# Altium PCB POT 10x8.PcbDoc (part 3 of 4)
Units mm, origin at the board's own origin, x right, y up, seen from the top; angles counter-clockwise.
Board outline 152.4 x 101.6 mm, 4 copper layers (Top Layer, Mid Layer 1, Mid Layer 2, Bottom Layer), stack 0.97 mm thick; 324 components, 355 nets, 1533 pads, 300 vias.
Unrouted connection lines stored in the file: 224.
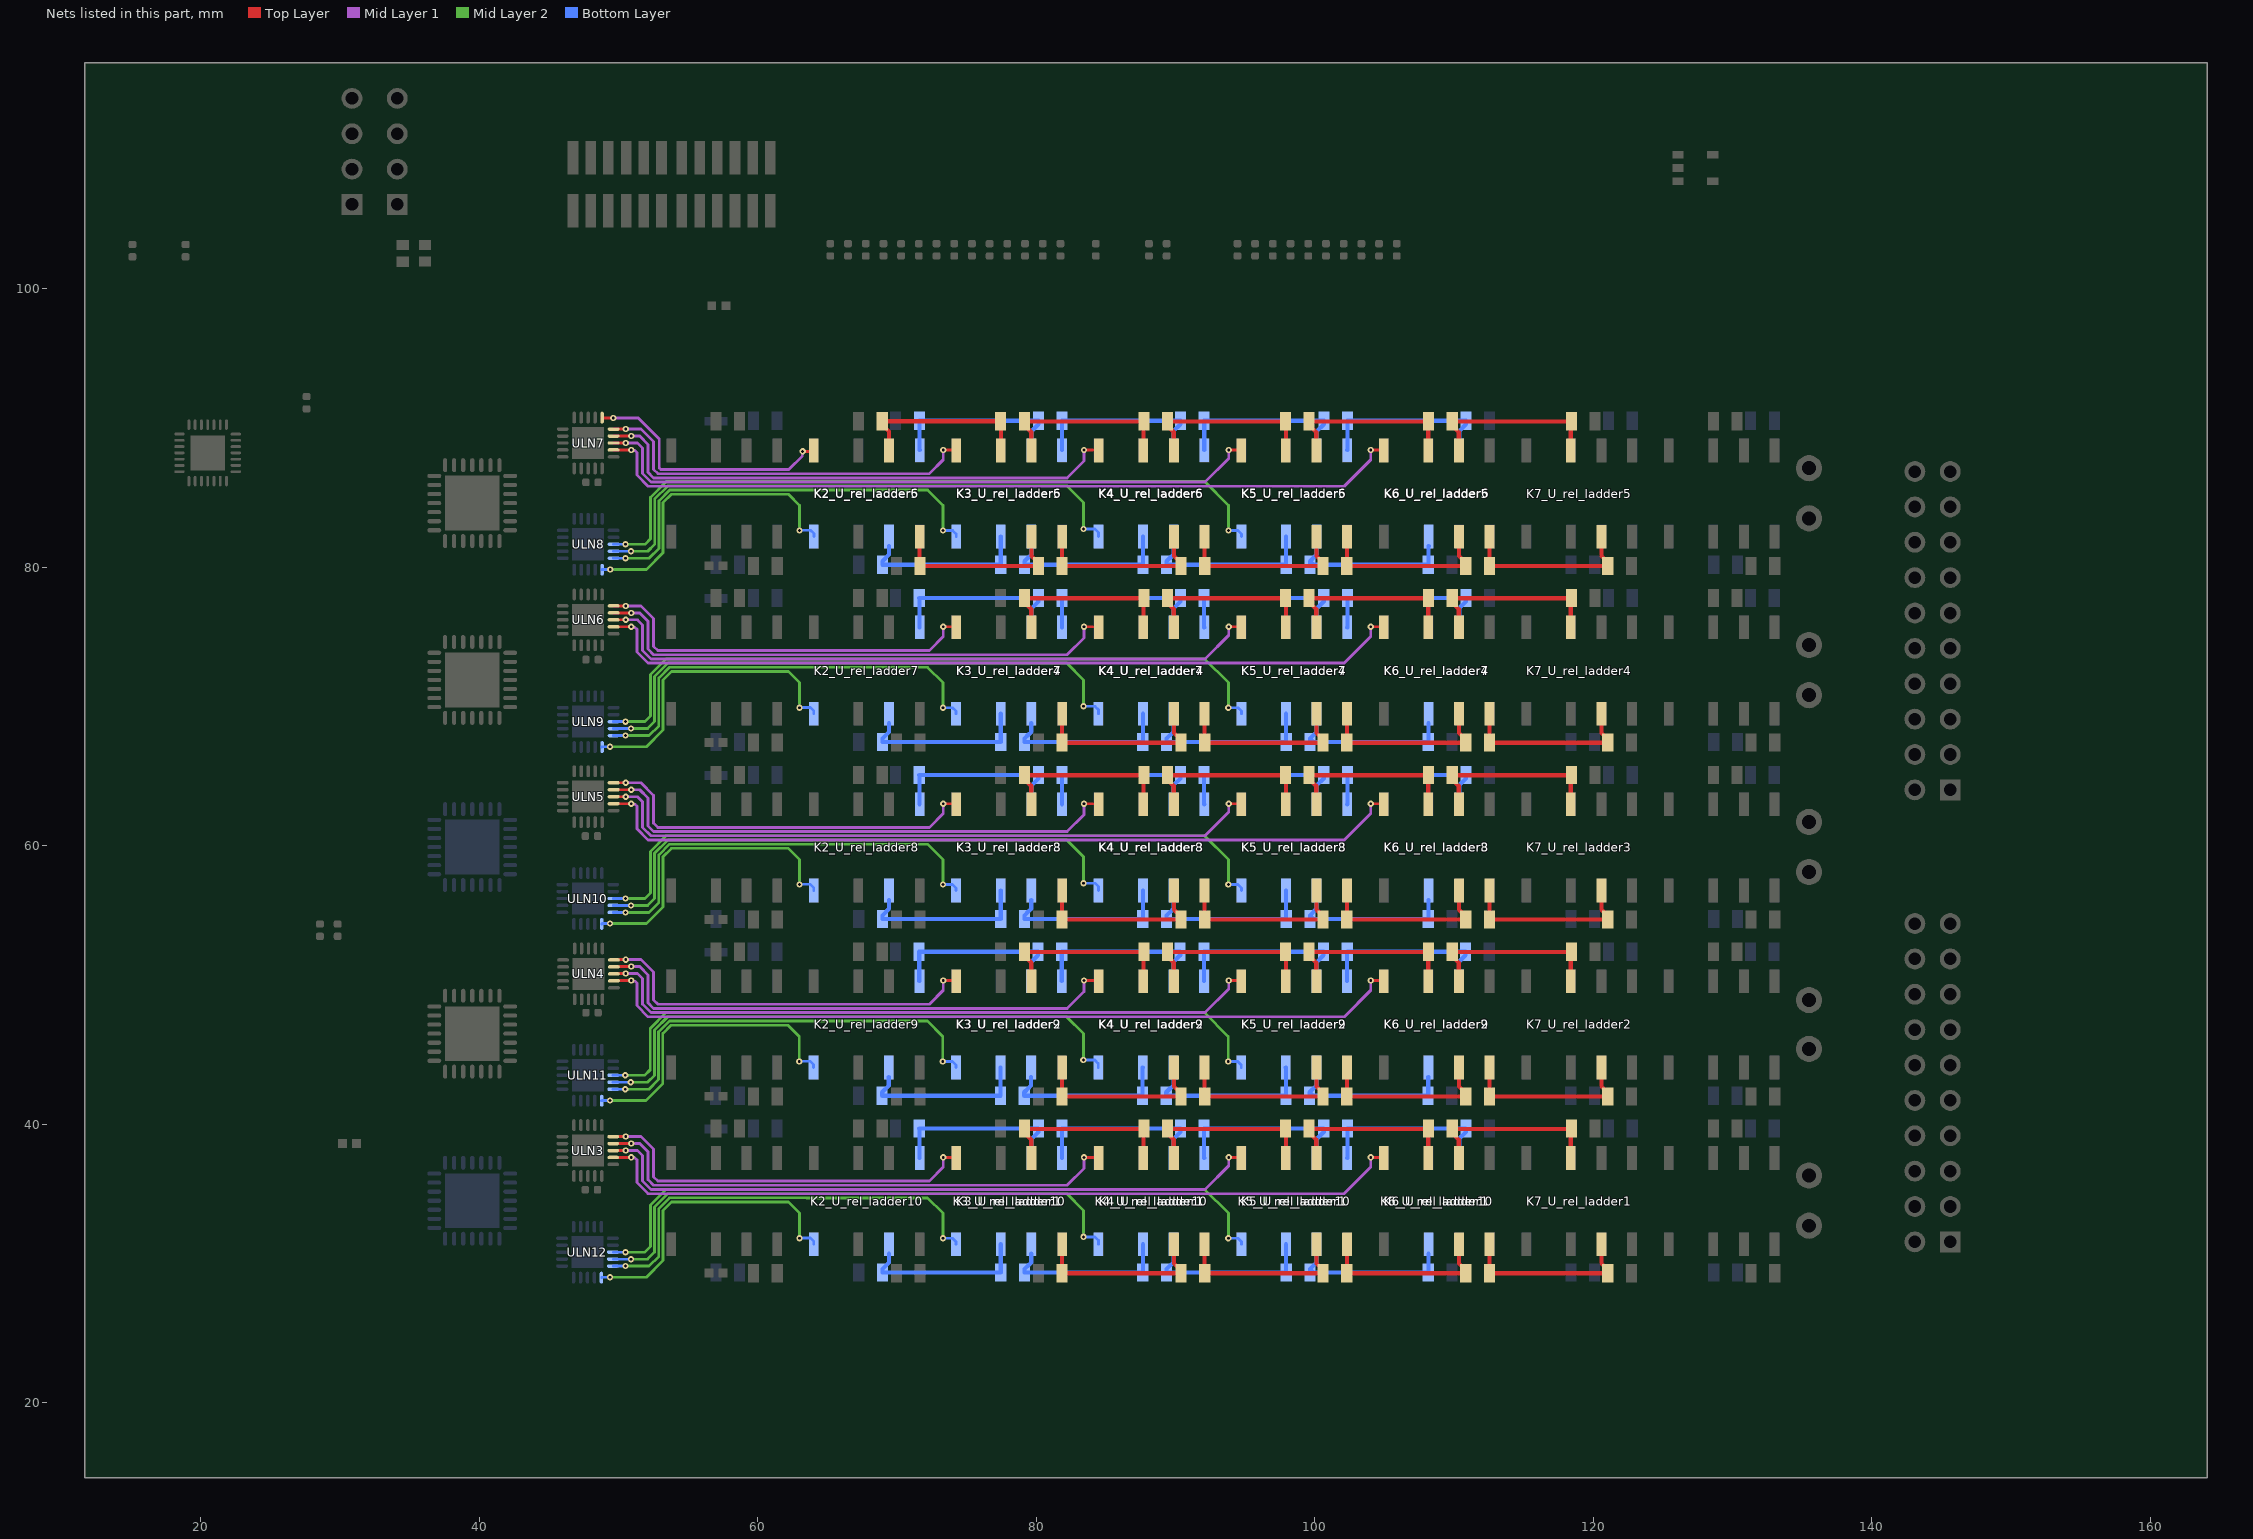
[diagram p5: the nets of this part, all layers, seen from the top]

## Via types
v1: diameter 0.45, hole 0.2, Top Layer to Bottom Layer, 186 vias
v2: diameter 0.5, hole 0.2, Top Layer to Bottom Layer, 85 vias
v3: diameter 0.6, hole 0.3, Top Layer to Bottom Layer, 25 vias
v4: diameter 0.66, hole 0.33, Top Layer to Bottom Layer, 4 vias

## Nets (pads, with @x,y where several pads share a name; then routed paths per layer and width w, separated by ;. In a path a pad name is that pad's centre, name@x,y a point inside that pad or via, vN(x,y) a via of type N, cw(c..) or ccw(c..) an arc to the next point about the centre after c; other vN are vias at no path point) (continued)
NetK2_U_rel_ladder5_4: K2_U_rel_ladder5.4 K3_U_rel_ladder5.3 R12_U_rel_ladder5.2 R14_U_rel_ladder5.1 | length 12.9
  Top Layer w0.3: K2_U_rel_ladder5.4@71.629,82.168 71.623,82.163 71.623,80.093 71.618,80.088 80.117,80.088 80.117,80.338 79.661,80.794 K3_U_rel_ladder5.3@79.661,82.168
NetK2_U_rel_ladder5_6: K2_U_rel_ladder5.6 K3_U_rel_ladder5.7 R11_U_rel_ladder5.2 R13_U_rel_ladder5.1 | length 12.9
  Top Layer w0.3: K2_U_rel_ladder5.6@69.436,88.361 69.436,89.737 68.955,90.218 68.955,90.468 77.454,90.468 77.461,90.461 K3_U_rel_ladder5.7@77.461,88.368 K3_U_rel_ladder5.7@77.468,88.361
NetK2_U_rel_ladder5_8: K2_U_rel_ladder5.8 ULN7.16 | length 18.7
  Top Layer w0.2: ULN7.16@48.825,90.734 48.825,90.732 48.848,90.709 v1(49.625,90.709) ; v1(63.225,88.309) 63.986,88.309 K2_U_rel_ladder5.8@64.054,88.377
  Mid Layer 1 w0.2: v1(49.625,90.709) 51.425,90.709 52.925,89.209 52.925,87.126 53.042,87.009 62.225,87.009 63.204,87.988 63.204,88.288 v1(63.225,88.309)
NetK2_U_rel_ladder6_4: K2_U_rel_ladder6.4 K3_U_rel_ladder6.3 R12_U_rel_ladder6.2 R14_U_rel_ladder6.1 | length 13
  Bottom Layer w0.3: K2_U_rel_ladder6.4@71.633,88.4 71.619,88.413 71.619,90.494 R14_U_rel_ladder6.1@71.606,90.507 R12_U_rel_ladder6.2@80.156,90.507 80.156,90.257 79.652,89.753 K3_U_rel_ladder6.3@79.652,88.4
NetK2_U_rel_ladder6_6: K2_U_rel_ladder6.6 K3_U_rel_ladder6.7 R11_U_rel_ladder6.2 R13_U_rel_ladder6.1 | length 12.1
  Bottom Layer w0.3: K2_U_rel_ladder6.6@69.433,81.521 69.433,80.892 68.956,80.416 R13_U_rel_ladder6.1@68.956,80.166 R11_U_rel_ladder6.2@77.456,80.166 77.454,80.168 77.454,82.198 K3_U_rel_ladder6.7@77.452,82.2
NetK2_U_rel_ladder6_8: K2_U_rel_ladder6.8 ULN8.16 | length 22
  Mid Layer 2 w0.2: v1(49.404,79.832) 52.004,79.832 53.204,81.032 53.204,84.632 53.804,85.232 62.204,85.232 63.004,84.432 v1(63.004,82.632)
  Bottom Layer w0.2: ULN8.16@48.804,79.807 48.804,79.809 48.827,79.832 v1(49.404,79.832) ; v1(63.004,82.632) 63.019,82.647 63.783,82.647 64.033,82.397 K2_U_rel_ladder6.8@64.033,82.2
NetK2_U_rel_ladder7_4: K2_U_rel_ladder7.4 K3_U_rel_ladder7.3 R12_U_rel_ladder7.2 R14_U_rel_ladder7.1 | length 13
  Bottom Layer w0.3: K2_U_rel_ladder7.4@71.629,75.668 71.615,75.681 71.615,77.762 R14_U_rel_ladder7.1@71.602,77.775 R12_U_rel_ladder7.2@80.152,77.775 80.152,77.525 79.648,77.021 K3_U_rel_ladder7.3@79.648,75.668
NetK2_U_rel_ladder7_6: K2_U_rel_ladder7.6 K3_U_rel_ladder7.7 R11_U_rel_ladder7.2 R13_U_rel_ladder7.1 | length 12.1
  Bottom Layer w0.3: K2_U_rel_ladder7.6@69.429,68.789 69.429,68.16 68.952,67.684 R13_U_rel_ladder7.1@68.952,67.434 R11_U_rel_ladder7.2@77.452,67.434 77.45,67.436 77.45,69.466 K3_U_rel_ladder7.7@77.448,69.468
NetK2_U_rel_ladder7_8: K2_U_rel_ladder7.8 ULN9.16 | length 22
  Mid Layer 2 w0.2: v1(49.4,67.1) 52,67.1 53.2,68.3 53.2,71.9 53.8,72.5 62.2,72.5 63,71.7 v1(63,69.9)
  Bottom Layer w0.2: ULN9.16@48.8,67.075 48.8,67.077 48.823,67.1 v1(49.4,67.1) ; v1(63,69.9) 63.015,69.915 63.779,69.915 64.029,69.665 K2_U_rel_ladder7.8@64.029,69.468
NetK2_U_rel_ladder8_4: K2_U_rel_ladder8.4 K3_U_rel_ladder8.3 R12_U_rel_ladder8.2 R14_U_rel_ladder8.1 | length 13
  Bottom Layer w0.3: K2_U_rel_ladder8.4@71.629,62.968 71.615,62.981 71.615,65.062 R14_U_rel_ladder8.1@71.602,65.075 R12_U_rel_ladder8.2@80.152,65.075 80.152,64.825 79.648,64.321 K3_U_rel_ladder8.3@79.648,62.968
NetK2_U_rel_ladder8_6: K2_U_rel_ladder8.6 K3_U_rel_ladder8.7 R11_U_rel_ladder8.2 R13_U_rel_ladder8.1 | length 12.1
  Bottom Layer w0.3: K2_U_rel_ladder8.6@69.429,56.089 69.429,55.46 68.952,54.984 R13_U_rel_ladder8.1@68.952,54.734 R11_U_rel_ladder8.2@77.452,54.734 77.45,54.736 77.45,56.766 K3_U_rel_ladder8.7@77.448,56.768
NetK2_U_rel_ladder8_8: K2_U_rel_ladder8.8 ULN10.16 | length 22
  Mid Layer 2 w0.2: v1(49.4,54.4) 52,54.4 53.2,55.6 53.2,59.2 53.8,59.8 62.2,59.8 63,59 v1(63,57.2)
  Bottom Layer w0.2: ULN10.16@48.8,54.373 ULN10.16@48.8,54.377 ; ULN10.16@48.823,54.4 v1(49.4,54.4) ; v1(63,57.2) 63.015,57.215 63.779,57.215 64.029,56.965 K2_U_rel_ladder8.8@64.029,56.768
NetK2_U_rel_ladder9_4: K2_U_rel_ladder9.4 K3_U_rel_ladder9.3 R12_U_rel_ladder9.2 R14_U_rel_ladder9.1 | length 13
  Bottom Layer w0.3: K2_U_rel_ladder9.4@71.614,50.268 71.601,50.281 71.601,52.362 R14_U_rel_ladder9.1@71.588,52.375 R12_U_rel_ladder9.2@80.138,52.375 80.138,52.125 79.634,51.621 K3_U_rel_ladder9.3@79.634,50.268
NetK2_U_rel_ladder9_6: K2_U_rel_ladder9.6 K3_U_rel_ladder9.7 R11_U_rel_ladder9.2 R13_U_rel_ladder9.1 | length 12.1
  Bottom Layer w0.3: K2_U_rel_ladder9.6@69.414,43.389 69.414,42.76 68.938,42.284 R13_U_rel_ladder9.1@68.938,42.034 R11_U_rel_ladder9.2@77.438,42.034 77.436,42.036 77.436,44.066 K3_U_rel_ladder9.7@77.434,44.068
NetK2_U_rel_ladder9_8: K2_U_rel_ladder9.8 ULN11.16 | length 22
  Mid Layer 2 w0.2: v1(49.386,41.7) 51.986,41.7 53.186,42.9 53.186,46.5 53.786,47.1 62.186,47.1 62.986,46.3 v1(62.986,44.5)
  Bottom Layer w0.2: ULN11.16@48.786,41.675 48.786,41.677 48.809,41.7 v1(49.386,41.7) ; v1(62.986,44.5) 63.001,44.515 63.764,44.515 64.014,44.265 K2_U_rel_ladder9.8@64.014,44.068
NetK2_U_rel_ladder10_4: K2_U_rel_ladder10.4 K3_U_rel_ladder10.3 R12_U_rel_ladder10.2 R14_U_rel_ladder10.1 | length 13
  Bottom Layer w0.3: K2_U_rel_ladder10.4@71.629,37.568 71.615,37.581 71.615,39.662 R14_U_rel_ladder10.1@71.602,39.675 R12_U_rel_ladder10.2@80.152,39.675 80.152,39.425 79.648,38.921 K3_U_rel_ladder10.3@79.648,37.568
NetK2_U_rel_ladder10_6: K2_U_rel_ladder10.6 K3_U_rel_ladder10.7 R11_U_rel_ladder10.2 R13_U_rel_ladder10.1 | length 12.1
  Bottom Layer w0.3: K2_U_rel_ladder10.6@69.429,30.689 69.429,30.06 68.952,29.584 R13_U_rel_ladder10.1@68.952,29.334 R11_U_rel_ladder10.2@77.452,29.334 77.45,29.336 77.45,31.366 K3_U_rel_ladder10.7@77.448,31.368
NetK2_U_rel_ladder10_8: K2_U_rel_ladder10.8 ULN12.16 | length 22
  Mid Layer 2 w0.2: v1(49.4,29) 52,29 53.2,30.2 53.2,33.8 53.8,34.4 62.2,34.4 63,33.6 v1(63,31.8)
  Bottom Layer w0.2: ULN12.16@48.8,28.975 48.8,28.977 48.823,29 v1(49.4,29) ; v1(63,31.8) 63.015,31.815 63.779,31.815 64.029,31.565 K2_U_rel_ladder10.8@64.029,31.368
NetK3_U_rel_ladder1_4: K3_U_rel_ladder1.4 K4_U_rel_ladder1.3 R10_U_rel_ladder1.2 R12_U_rel_ladder1.1 | length 12.9
  Top Layer w0.3: K3_U_rel_ladder1.4@81.861,31.368 81.856,31.363 81.856,29.293 81.85,29.288 90.349,29.288 90.349,29.538 89.894,29.994 K4_U_rel_ladder1.3@89.894,31.368
NetK3_U_rel_ladder1_6: K3_U_rel_ladder1.6 K4_U_rel_ladder1.7 R9_U_rel_ladder1.2 R11_U_rel_ladder1.1 | length 13
  Top Layer w0.3: K3_U_rel_ladder1.6@79.641,37.548 79.641,38.891 79.127,39.405 79.127,39.655 87.714,39.655 87.694,39.635 K4_U_rel_ladder1.7@87.694,37.568 K4_U_rel_ladder1.7@87.674,37.548
NetK3_U_rel_ladder1_8: K3_U_rel_ladder1.8 ULN3.15 | length 28.3
  Top Layer w0.2: ULN3.15@49.65,39.109 v1(50.525,39.109) ; v1(73.325,37.609) 74.254,37.609 K3_U_rel_ladder1.8@74.286,37.577
  Mid Layer 1 w0.2: v1(50.525,39.109) 51.625,39.109 52.525,38.209 52.525,36.209 52.827,35.907 72.323,35.907 73.325,36.909 v1(73.325,37.609)
NetK3_U_rel_ladder2_4: K3_U_rel_ladder2.4 K4_U_rel_ladder2.3 R10_U_rel_ladder2.2 R12_U_rel_ladder2.1 | length 12.9
  Top Layer w0.3: K3_U_rel_ladder2.4@81.861,44.068 81.856,44.063 81.856,41.993 81.85,41.988 90.349,41.988 90.349,42.238 89.894,42.694 K4_U_rel_ladder2.3@89.894,44.068
NetK3_U_rel_ladder2_6: K3_U_rel_ladder2.6 K4_U_rel_ladder2.7 R9_U_rel_ladder2.2 R11_U_rel_ladder2.1 | length 13
  Top Layer w0.3: K3_U_rel_ladder2.6@79.641,50.248 79.641,51.591 79.127,52.105 79.127,52.355 87.714,52.355 87.694,52.335 K4_U_rel_ladder2.7@87.694,50.268 K4_U_rel_ladder2.7@87.674,50.248
NetK3_U_rel_ladder2_8: K3_U_rel_ladder2.8 ULN4.15 | length 28.3
  Top Layer w0.2: ULN4.15@49.65,51.809 v1(50.525,51.809) ; v1(73.325,50.309) 74.254,50.309 K3_U_rel_ladder2.8@74.286,50.277
  Mid Layer 1 w0.2: v1(50.525,51.809) 51.625,51.809 52.525,50.909 52.525,48.909 52.827,48.607 72.323,48.607 73.325,49.609 v1(73.325,50.309)
NetK3_U_rel_ladder3_4: K3_U_rel_ladder3.4 K4_U_rel_ladder3.3 R10_U_rel_ladder3.2 R12_U_rel_ladder3.1 | length 12.9
  Top Layer w0.3: K3_U_rel_ladder3.4@81.861,56.768 81.856,56.763 81.856,54.693 81.85,54.688 90.349,54.688 90.349,54.938 89.894,55.394 K4_U_rel_ladder3.3@89.894,56.768
NetK3_U_rel_ladder3_6: K3_U_rel_ladder3.6 K4_U_rel_ladder3.7 R9_U_rel_ladder3.2 R11_U_rel_ladder3.1 | length 13
  Top Layer w0.3: K3_U_rel_ladder3.6@79.641,62.948 79.641,64.291 79.127,64.805 79.127,65.055 87.714,65.055 87.694,65.035 K4_U_rel_ladder3.7@87.694,62.968 K4_U_rel_ladder3.7@87.674,62.948
NetK3_U_rel_ladder3_8: K3_U_rel_ladder3.8 ULN5.15 | length 28.3
  Top Layer w0.2: ULN5.15@49.65,64.509 v1(50.525,64.509) ; v1(73.325,63.009) 74.254,63.009 K3_U_rel_ladder3.8@74.286,62.977
  Mid Layer 1 w0.2: v1(50.525,64.509) 51.625,64.509 52.525,63.609 52.525,61.609 52.827,61.307 72.323,61.307 73.325,62.309 v1(73.325,63.009)
NetK3_U_rel_ladder4_4: K3_U_rel_ladder4.4 K4_U_rel_ladder4.3 R10_U_rel_ladder4.2 R12_U_rel_ladder4.1 | length 12.9
  Top Layer w0.3: K3_U_rel_ladder4.4@81.861,69.468 81.856,69.463 81.856,67.393 81.85,67.388 90.349,67.388 90.349,67.638 89.894,68.094 K4_U_rel_ladder4.3@89.894,69.468
NetK3_U_rel_ladder4_6: K3_U_rel_ladder4.6 K4_U_rel_ladder4.7 R9_U_rel_ladder4.2 R11_U_rel_ladder4.1 | length 13
  Top Layer w0.3: K3_U_rel_ladder4.6@79.641,75.648 79.641,76.991 79.127,77.505 79.127,77.755 87.714,77.755 87.694,77.735 K4_U_rel_ladder4.7@87.694,75.668 K4_U_rel_ladder4.7@87.674,75.648
NetK3_U_rel_ladder4_8: K3_U_rel_ladder4.8 ULN6.15 | length 28.3
  Top Layer w0.2: ULN6.15@49.65,77.209 v1(50.525,77.209) ; v1(73.325,75.709) 74.254,75.709 K3_U_rel_ladder4.8@74.286,75.677
  Mid Layer 1 w0.2: v1(50.525,77.209) 51.625,77.209 52.525,76.309 52.525,74.309 52.827,74.007 72.323,74.007 73.325,75.009 v1(73.325,75.709)
NetK3_U_rel_ladder5_4: K3_U_rel_ladder5.4 K4_U_rel_ladder5.3 R10_U_rel_ladder5.2 R12_U_rel_ladder5.1 | length 12.9
  Top Layer w0.3: K3_U_rel_ladder5.4@81.861,82.168 81.856,82.163 81.856,80.093 81.85,80.088 90.349,80.088 90.349,80.338 89.894,80.794 K4_U_rel_ladder5.3@89.894,82.168
NetK3_U_rel_ladder5_6: K3_U_rel_ladder5.6 K4_U_rel_ladder5.7 R9_U_rel_ladder5.2 R11_U_rel_ladder5.1 | length 13
  Top Layer w0.3: K3_U_rel_ladder5.6@79.641,88.348 79.641,89.691 79.127,90.205 79.127,90.455 87.714,90.455 87.694,90.435 K4_U_rel_ladder5.7@87.694,88.368 K4_U_rel_ladder5.7@87.674,88.348
NetK3_U_rel_ladder5_8: K3_U_rel_ladder5.8 ULN7.15 | length 28.3
  Top Layer w0.2: ULN7.15@49.65,89.909 v1(50.525,89.909) ; v1(73.325,88.409) 74.254,88.409 K3_U_rel_ladder5.8@74.286,88.377
  Mid Layer 1 w0.2: v1(50.525,89.909) 51.625,89.909 52.525,89.009 52.525,87.009 52.827,86.707 72.323,86.707 73.325,87.709 v1(73.325,88.409)
NetK3_U_rel_ladder6_4: K3_U_rel_ladder6.4 K4_U_rel_ladder6.3 R10_U_rel_ladder6.2 R12_U_rel_ladder6.1 | length 12.9
  Bottom Layer w0.3: K3_U_rel_ladder6.4@81.852,88.4 81.854,88.402 81.854,90.505 R12_U_rel_ladder6.1@81.856,90.507 R10_U_rel_ladder6.2@90.356,90.507 90.356,90.257 89.868,89.769 K4_U_rel_ladder6.3@89.868,88.4
NetK3_U_rel_ladder6_6: K3_U_rel_ladder6.6 K4_U_rel_ladder6.7 R9_U_rel_ladder6.2 R11_U_rel_ladder6.1 | length 12.1
  Bottom Layer w0.3: K3_U_rel_ladder6.6@79.652,81.521 79.652,80.9 79.476,80.724 79.464,80.724 79.156,80.416 R11_U_rel_ladder6.1@79.156,80.166 R9_U_rel_ladder6.2@87.656,80.166 87.662,80.172 87.662,82.194 K4_U_rel_ladder6.7@87.668,82.2
NetK3_U_rel_ladder6_8: K3_U_rel_ladder6.8 ULN8.15 | length 31.2
  Mid Layer 2 w0.2: v1(50.504,80.632) 52.202,80.632 52.902,81.332 52.902,84.757 53.679,85.534 63.502,85.534 63.504,85.532 72.204,85.532 73.304,84.432 v1(73.304,82.632)
  Bottom Layer w0.2: ULN8.15@49.629,80.632 v1(50.504,80.632) ; v1(73.304,82.632) 74.002,82.632 74.252,82.382 K3_U_rel_ladder6.8@74.252,82.2
NetK3_U_rel_ladder7_4: K3_U_rel_ladder7.4 K4_U_rel_ladder7.3 R10_U_rel_ladder7.2 R12_U_rel_ladder7.1 | length 12.9
  Bottom Layer w0.3: K3_U_rel_ladder7.4@81.848,75.668 K3_U_rel_ladder7.4@81.848,75.668 81.85,77.773 R12_U_rel_ladder7.1@81.852,77.775 R10_U_rel_ladder7.2@90.352,77.775 90.352,77.525 89.864,77.037 K4_U_rel_ladder7.3@89.864,75.668
NetK3_U_rel_ladder7_6: K3_U_rel_ladder7.6 K4_U_rel_ladder7.7 R9_U_rel_ladder7.2 R11_U_rel_ladder7.1 | length 12.1
  Bottom Layer w0.3: K3_U_rel_ladder7.6@79.648,68.789 79.648,68.168 79.472,67.992 79.46,67.992 79.152,67.684 R11_U_rel_ladder7.1@79.152,67.434 R9_U_rel_ladder7.2@87.652,67.434 87.658,67.44 87.658,69.462 K4_U_rel_ladder7.7@87.664,69.468
NetK3_U_rel_ladder7_8: K3_U_rel_ladder7.8 ULN9.15 | length 31.2
  Mid Layer 2 w0.2: v1(50.5,67.9) 52.198,67.9 52.898,68.6 52.898,72.025 53.675,72.802 63.498,72.802 63.5,72.8 72.2,72.8 73.3,71.7 v1(73.3,69.9)
  Bottom Layer w0.2: ULN9.15@49.625,67.9 v1(50.5,67.9) ; v1(73.3,69.9) 73.998,69.9 74.248,69.65 K3_U_rel_ladder7.8@74.248,69.468
NetK3_U_rel_ladder8_4: K3_U_rel_ladder8.4 K4_U_rel_ladder8.3 R10_U_rel_ladder8.2 R12_U_rel_ladder8.1 | length 12.9
  Bottom Layer w0.3: K3_U_rel_ladder8.4@81.848,62.968 K3_U_rel_ladder8.4@81.848,62.968 81.85,65.073 R12_U_rel_ladder8.1@81.852,65.075 R10_U_rel_ladder8.2@90.352,65.075 90.352,64.825 89.864,64.337 K4_U_rel_ladder8.3@89.864,62.968
NetK3_U_rel_ladder8_6: K3_U_rel_ladder8.6 K4_U_rel_ladder8.7 R9_U_rel_ladder8.2 R11_U_rel_ladder8.1 | length 12.1
  Bottom Layer w0.3: K3_U_rel_ladder8.6@79.648,56.089 79.648,55.468 79.472,55.292 79.46,55.292 79.152,54.984 R11_U_rel_ladder8.1@79.152,54.734 R9_U_rel_ladder8.2@87.652,54.734 87.658,54.74 87.658,56.762 K4_U_rel_ladder8.7@87.664,56.768
NetK3_U_rel_ladder8_8: K3_U_rel_ladder8.8 ULN10.15 | length 31.2
  Mid Layer 2 w0.2: v1(50.5,55.2) 52.198,55.2 52.898,55.9 52.898,59.325 53.675,60.102 63.498,60.102 63.5,60.1 72.2,60.1 73.3,59 v1(73.3,57.2)
  Bottom Layer w0.2: ULN10.15@49.625,55.198 v1(50.5,55.2) ; v1(73.3,57.2) 73.998,57.2 74.248,56.95 K3_U_rel_ladder8.8@74.248,56.768
NetK3_U_rel_ladder9_4: K3_U_rel_ladder9.4 K4_U_rel_ladder9.3 R10_U_rel_ladder9.2 R12_U_rel_ladder9.1 | length 12.9
  Bottom Layer w0.3: K3_U_rel_ladder9.4@81.834,50.268 81.836,50.27 81.836,52.373 R12_U_rel_ladder9.1@81.838,52.375 R10_U_rel_ladder9.2@90.338,52.375 90.338,52.125 89.85,51.637 K4_U_rel_ladder9.3@89.85,50.268
NetK3_U_rel_ladder9_6: K3_U_rel_ladder9.6 K4_U_rel_ladder9.7 R9_U_rel_ladder9.2 R11_U_rel_ladder9.1 | length 12.1
  Bottom Layer w0.3: K3_U_rel_ladder9.6@79.634,43.389 79.634,42.768 79.458,42.592 79.446,42.592 79.138,42.284 R11_U_rel_ladder9.1@79.138,42.034 R9_U_rel_ladder9.2@87.638,42.034 87.644,42.04 87.644,44.062 K4_U_rel_ladder9.7@87.65,44.068
NetK3_U_rel_ladder9_8: K3_U_rel_ladder9.8 ULN11.15 | length 31.2
  Mid Layer 2 w0.2: v1(50.486,42.5) 52.184,42.5 52.884,43.2 52.884,46.625 53.661,47.402 63.484,47.402 63.486,47.4 72.186,47.4 73.286,46.3 v1(73.286,44.5)
  Bottom Layer w0.2: ULN11.15@49.611,42.5 v1(50.486,42.5) ; v1(73.286,44.5) 73.984,44.5 74.234,44.25 K3_U_rel_ladder9.8@74.234,44.068
NetK3_U_rel_ladder10_4: K3_U_rel_ladder10.4 K4_U_rel_ladder10.3 R10_U_rel_ladder10.2 R12_U_rel_ladder10.1 | length 12.9
  Bottom Layer w0.3: K3_U_rel_ladder10.4@81.848,37.568 K3_U_rel_ladder10.4@81.848,37.568 81.85,39.673 R12_U_rel_ladder10.1@81.852,39.675 R10_U_rel_ladder10.2@90.352,39.675 90.352,39.425 89.864,38.937 K4_U_rel_ladder10.3@89.864,37.568
NetK3_U_rel_ladder10_6: K3_U_rel_ladder10.6 K4_U_rel_ladder10.7 R9_U_rel_ladder10.2 R11_U_rel_ladder10.1 | length 12.1
  Bottom Layer w0.3: K3_U_rel_ladder10.6@79.648,30.689 79.648,30.068 79.472,29.892 79.46,29.892 79.152,29.584 R11_U_rel_ladder10.1@79.152,29.334 R9_U_rel_ladder10.2@87.652,29.334 87.658,29.34 87.658,31.362 K4_U_rel_ladder10.7@87.664,31.368
NetK3_U_rel_ladder10_8: K3_U_rel_ladder10.8 ULN12.15 | length 31.2
  Mid Layer 2 w0.2: v1(50.5,29.8) 52.198,29.8 52.898,30.5 52.898,33.925 53.675,34.702 63.498,34.702 63.5,34.7 72.2,34.7 73.3,33.6 v1(73.3,31.8)
  Bottom Layer w0.2: ULN12.15@49.625,29.8 v1(50.5,29.8) ; v1(73.3,31.8) 73.998,31.8 74.248,31.55 K3_U_rel_ladder10.8@74.248,31.368
NetK4_U_rel_ladder1_4: K4_U_rel_ladder1.4 K5_U_rel_ladder1.3 R8_U_rel_ladder1.2 R10_U_rel_ladder1.1 | length 12.9
  Top Layer w0.3: K4_U_rel_ladder1.4@92.094,31.368 92.088,31.363 92.088,29.293 92.083,29.288 100.582,29.288 100.582,29.538 100.126,29.994 K5_U_rel_ladder1.3@100.126,31.368
NetK4_U_rel_ladder1_6: K4_U_rel_ladder1.6 K5_U_rel_ladder1.7 R7_U_rel_ladder1.2 R9_U_rel_ladder1.1 | length 13
  Top Layer w0.3: K4_U_rel_ladder1.6@89.874,37.548 89.874,38.891 89.359,39.405 89.359,39.655 97.946,39.655 97.926,39.635 K5_U_rel_ladder1.7@97.926,37.568 K5_U_rel_ladder1.7@97.906,37.548
NetK4_U_rel_ladder1_8: K4_U_rel_ladder1.8 ULN3.14 | length 38.6
  Top Layer w0.2: ULN3.14@49.65,38.609 v1(50.925,38.609) ; v1(83.425,37.609) 84.487,37.609 K4_U_rel_ladder1.8@84.519,37.577
  Mid Layer 1 w0.2: v1(50.925,38.609) 51.525,38.609 52.125,38.009 52.125,36.009 52.528,35.606 82.222,35.606 83.425,36.809 v1(83.425,37.609)
NetK4_U_rel_ladder2_4: K4_U_rel_ladder2.4 K5_U_rel_ladder2.3 R8_U_rel_ladder2.2 R10_U_rel_ladder2.1 | length 12.9
  Top Layer w0.3: K4_U_rel_ladder2.4@92.094,44.068 92.088,44.063 92.088,41.993 92.083,41.988 100.582,41.988 100.582,42.238 100.126,42.694 K5_U_rel_ladder2.3@100.126,44.068
NetK4_U_rel_ladder2_6: K4_U_rel_ladder2.6 K5_U_rel_ladder2.7 R7_U_rel_ladder2.2 R9_U_rel_ladder2.1 | length 13
  Top Layer w0.3: K4_U_rel_ladder2.6@89.874,50.248 89.874,51.591 89.359,52.105 89.359,52.355 97.946,52.355 97.926,52.335 K5_U_rel_ladder2.7@97.926,50.268 K5_U_rel_ladder2.7@97.906,50.248
NetK4_U_rel_ladder2_8: K4_U_rel_ladder2.8 ULN4.14 | length 38.6
  Top Layer w0.2: ULN4.14@49.65,51.309 v1(50.925,51.309) ; v1(83.425,50.309) 84.487,50.309 K4_U_rel_ladder2.8@84.519,50.277
  Mid Layer 1 w0.2: v1(50.925,51.309) 51.525,51.309 52.125,50.709 52.125,48.709 52.528,48.306 82.222,48.306 83.425,49.509 v1(83.425,50.309)
NetK4_U_rel_ladder3_4: K4_U_rel_ladder3.4 K5_U_rel_ladder3.3 R8_U_rel_ladder3.2 R10_U_rel_ladder3.1 | length 12.9
  Top Layer w0.3: K4_U_rel_ladder3.4@92.094,56.768 92.088,56.763 92.088,54.693 92.083,54.688 100.582,54.688 100.582,54.938 100.126,55.394 K5_U_rel_ladder3.3@100.126,56.768
NetK4_U_rel_ladder3_6: K4_U_rel_ladder3.6 K5_U_rel_ladder3.7 R7_U_rel_ladder3.2 R9_U_rel_ladder3.1 | length 13
  Top Layer w0.3: K4_U_rel_ladder3.6@89.874,62.948 89.874,64.291 89.359,64.805 89.359,65.055 97.946,65.055 97.926,65.035 K5_U_rel_ladder3.7@97.926,62.968 K5_U_rel_ladder3.7@97.906,62.948
NetK4_U_rel_ladder3_8: K4_U_rel_ladder3.8 ULN5.14 | length 38.6
  Top Layer w0.2: ULN5.14@49.65,64.009 v1(50.925,64.009) ; v1(83.425,63.009) 84.487,63.009 K4_U_rel_ladder3.8@84.519,62.977
  Mid Layer 1 w0.2: v1(50.925,64.009) 51.525,64.009 52.125,63.409 52.125,61.409 52.528,61.006 82.222,61.006 83.425,62.209 v1(83.425,63.009)
NetK4_U_rel_ladder4_4: K4_U_rel_ladder4.4 K5_U_rel_ladder4.3 R8_U_rel_ladder4.2 R10_U_rel_ladder4.1 | length 12.9
  Top Layer w0.3: K4_U_rel_ladder4.4@92.094,69.468 92.088,69.463 92.088,67.393 92.083,67.388 100.582,67.388 100.582,67.638 100.126,68.094 K5_U_rel_ladder4.3@100.126,69.468
NetK4_U_rel_ladder4_6: K4_U_rel_ladder4.6 K5_U_rel_ladder4.7 R7_U_rel_ladder4.2 R9_U_rel_ladder4.1 | length 13
  Top Layer w0.3: K4_U_rel_ladder4.6@89.874,75.648 89.874,76.991 89.359,77.505 89.359,77.755 97.946,77.755 97.926,77.735 K5_U_rel_ladder4.7@97.926,75.668 K5_U_rel_ladder4.7@97.906,75.648
NetK4_U_rel_ladder4_8: K4_U_rel_ladder4.8 ULN6.14 | length 38.6
  Top Layer w0.2: ULN6.14@49.65,76.709 v1(50.925,76.709) ; v1(83.425,75.709) 84.487,75.709 K4_U_rel_ladder4.8@84.519,75.677
  Mid Layer 1 w0.2: v1(50.925,76.709) 51.525,76.709 52.125,76.109 52.125,74.109 52.528,73.706 82.222,73.706 83.425,74.909 v1(83.425,75.709)
NetK4_U_rel_ladder5_4: K4_U_rel_ladder5.4 K5_U_rel_ladder5.3 R8_U_rel_ladder5.2 R10_U_rel_ladder5.1 | length 12.9
  Top Layer w0.3: K4_U_rel_ladder5.4@92.094,82.168 92.088,82.163 92.088,80.093 92.083,80.088 100.582,80.088 100.582,80.338 100.126,80.794 K5_U_rel_ladder5.3@100.126,82.168
NetK4_U_rel_ladder5_6: K4_U_rel_ladder5.6 K5_U_rel_ladder5.7 R7_U_rel_ladder5.2 R9_U_rel_ladder5.1 | length 13
  Top Layer w0.3: K4_U_rel_ladder5.6@89.874,88.348 89.874,89.691 89.359,90.205 89.359,90.455 97.946,90.455 97.926,90.435 K5_U_rel_ladder5.7@97.926,88.368 K5_U_rel_ladder5.7@97.906,88.348
NetK4_U_rel_ladder5_8: K4_U_rel_ladder5.8 ULN7.14 | length 38.6
  Top Layer w0.2: ULN7.14@49.65,89.409 v1(50.925,89.409) ; v1(83.425,88.409) 84.487,88.409 K4_U_rel_ladder5.8@84.519,88.377
  Mid Layer 1 w0.2: v1(50.925,89.409) 51.525,89.409 52.125,88.809 52.125,86.809 52.528,86.406 82.222,86.406 83.425,87.609 v1(83.425,88.409)
NetK4_U_rel_ladder6_4: K4_U_rel_ladder6.4 K5_U_rel_ladder6.3 R8_U_rel_ladder6.2 R10_U_rel_ladder6.1 | length 13
  Bottom Layer w0.3: K4_U_rel_ladder6.4@92.068,88.4 92.062,88.406 92.062,90.501 R10_U_rel_ladder6.1@92.056,90.507 R8_U_rel_ladder6.2@100.656,90.507 100.656,90.257 100.139,89.74 K5_U_rel_ladder6.3@100.139,88.4
NetK4_U_rel_ladder6_6: K4_U_rel_ladder6.6 K5_U_rel_ladder6.7 R7_U_rel_ladder6.2 R9_U_rel_ladder6.1 | length 12.9
  Bottom Layer w0.3: K4_U_rel_ladder6.6@89.868,82.2 89.868,80.9 89.634,80.666 89.606,80.666 89.356,80.416 R9_U_rel_ladder6.1@89.356,80.166 R7_U_rel_ladder6.2@97.956,80.166 97.947,80.174 97.947,82.191 K5_U_rel_ladder6.7@97.939,82.2
NetK4_U_rel_ladder6_8: K4_U_rel_ladder6.8 ULN8.14 | length 41.5
  Mid Layer 2 w0.2: v1(50.904,81.132) 52.101,81.132 52.601,81.632 52.601,84.882 53.554,85.835 82.201,85.835 83.404,84.632 v1(83.404,82.732)
  Bottom Layer w0.2: ULN8.14@49.629,81.132 v1(50.904,81.132) ; v1(83.404,82.732) 84.218,82.732 84.468,82.482 K4_U_rel_ladder6.8@84.468,82.2
NetK4_U_rel_ladder7_4: K4_U_rel_ladder7.4 K5_U_rel_ladder7.3 R8_U_rel_ladder7.2 R10_U_rel_ladder7.1 | length 13
  Bottom Layer w0.3: K4_U_rel_ladder7.4@92.064,75.668 92.058,75.674 92.058,77.769 R10_U_rel_ladder7.1@92.052,77.775 R8_U_rel_ladder7.2@100.652,77.775 100.652,77.525 100.135,77.008 K5_U_rel_ladder7.3@100.135,75.668
NetK4_U_rel_ladder7_6: K4_U_rel_ladder7.6 K5_U_rel_ladder7.7 R7_U_rel_ladder7.2 R9_U_rel_ladder7.1 | length 12.9
  Bottom Layer w0.3: K4_U_rel_ladder7.6@89.864,69.468 89.864,68.168 89.63,67.934 89.602,67.934 89.352,67.684 R9_U_rel_ladder7.1@89.352,67.434 R7_U_rel_ladder7.2@97.952,67.434 97.943,67.442 97.943,69.459 K5_U_rel_ladder7.7@97.935,69.468
NetK4_U_rel_ladder7_8: K4_U_rel_ladder7.8 ULN9.14 | length 41.5
  Mid Layer 2 w0.2: v1(50.9,68.4) 52.097,68.4 52.597,68.9 52.597,72.15 53.55,73.103 82.197,73.103 83.4,71.9 v1(83.4,70)
  Bottom Layer w0.2: ULN9.14@49.625,68.4 v1(50.9,68.4) ; v1(83.4,70) 84.214,70 84.464,69.75 K4_U_rel_ladder7.8@84.464,69.468
NetK4_U_rel_ladder8_4: K4_U_rel_ladder8.4 K5_U_rel_ladder8.3 R8_U_rel_ladder8.2 R10_U_rel_ladder8.1 | length 13
  Bottom Layer w0.3: K4_U_rel_ladder8.4@92.064,62.968 92.058,62.974 92.058,65.069 R10_U_rel_ladder8.1@92.052,65.075 R8_U_rel_ladder8.2@100.652,65.075 100.652,64.825 100.135,64.308 K5_U_rel_ladder8.3@100.135,62.968
NetK4_U_rel_ladder8_6: K4_U_rel_ladder8.6 K5_U_rel_ladder8.7 R7_U_rel_ladder8.2 R9_U_rel_ladder8.1 | length 12.9
  Bottom Layer w0.3: K4_U_rel_ladder8.6@89.864,56.768 89.864,55.468 89.63,55.234 89.602,55.234 89.352,54.984 R9_U_rel_ladder8.1@89.352,54.734 R7_U_rel_ladder8.2@97.952,54.734 97.943,54.742 97.943,56.759 K5_U_rel_ladder8.7@97.935,56.768
NetK4_U_rel_ladder8_8: K4_U_rel_ladder8.8 ULN10.14 | length 41.5
  Mid Layer 2 w0.2: v1(50.9,55.7) 52.097,55.7 52.597,56.2 52.597,59.45 53.55,60.403 82.197,60.403 83.4,59.2 v1(83.4,57.3)
  Bottom Layer w0.2: ULN10.14@49.625,55.7 v1(50.9,55.7) ; v1(83.4,57.3) 84.214,57.3 84.464,57.05 K4_U_rel_ladder8.8@84.464,56.768
NetK4_U_rel_ladder9_4: K4_U_rel_ladder9.4 K5_U_rel_ladder9.3 R8_U_rel_ladder9.2 R10_U_rel_ladder9.1 | length 13
  Bottom Layer w0.3: K4_U_rel_ladder9.4@92.05,50.268 92.044,50.274 92.044,52.369 R10_U_rel_ladder9.1@92.038,52.375 R8_U_rel_ladder9.2@100.638,52.375 100.638,52.125 100.121,51.608 K5_U_rel_ladder9.3@100.121,50.268
NetK4_U_rel_ladder9_6: K4_U_rel_ladder9.6 K5_U_rel_ladder9.7 R7_U_rel_ladder9.2 R9_U_rel_ladder9.1 | length 12.9
  Bottom Layer w0.3: K4_U_rel_ladder9.6@89.85,44.068 89.85,42.768 89.616,42.534 89.588,42.534 89.338,42.284 R9_U_rel_ladder9.1@89.338,42.034 R7_U_rel_ladder9.2@97.938,42.034 97.929,42.042 97.929,44.059 K5_U_rel_ladder9.7@97.921,44.068
NetK4_U_rel_ladder9_8: K4_U_rel_ladder9.8 ULN11.14 | length 41.5
  Mid Layer 2 w0.2: v1(50.886,43) 52.083,43 52.583,43.5 52.583,46.75 53.536,47.703 82.183,47.703 83.386,46.5 v1(83.386,44.6)
  Bottom Layer w0.2: ULN11.14@49.611,43 v1(50.886,43) ; v1(83.386,44.6) 84.2,44.6 84.45,44.35 K4_U_rel_ladder9.8@84.45,44.068
NetK4_U_rel_ladder10_4: K4_U_rel_ladder10.4 K5_U_rel_ladder10.3 R8_U_rel_ladder10.2 R10_U_rel_ladder10.1 | length 13
  Bottom Layer w0.3: K4_U_rel_ladder10.4@92.064,37.568 92.058,37.574 92.058,39.669 R10_U_rel_ladder10.1@92.052,39.675 R8_U_rel_ladder10.2@100.652,39.675 100.652,39.425 100.135,38.908 K5_U_rel_ladder10.3@100.135,37.568
NetK4_U_rel_ladder10_6: K4_U_rel_ladder10.6 K5_U_rel_ladder10.7 R7_U_rel_ladder10.2 R9_U_rel_ladder10.1 | length 12.9
  Bottom Layer w0.3: K4_U_rel_ladder10.6@89.864,31.368 89.864,30.068 89.63,29.834 89.602,29.834 89.352,29.584 R9_U_rel_ladder10.1@89.352,29.334 R7_U_rel_ladder10.2@97.952,29.334 97.943,29.342 97.943,31.359 K5_U_rel_ladder10.7@97.935,31.368
NetK4_U_rel_ladder10_8: K4_U_rel_ladder10.8 ULN12.14 | length 41.5
  Mid Layer 2 w0.2: v1(50.9,30.3) 52.097,30.3 52.597,30.8 52.597,34.05 53.55,35.003 82.197,35.003 83.4,33.8 v1(83.4,31.9)
  Bottom Layer w0.2: ULN12.14@49.625,30.3 v1(50.9,30.3) ; v1(83.4,31.9) 84.214,31.9 84.464,31.65 K4_U_rel_ladder10.8@84.464,31.368
NetK5_U_rel_ladder1_4: K5_U_rel_ladder1.4 K6_U_rel_ladder1.3 R6_U_rel_ladder1.2 R8_U_rel_ladder1.1 | length 12.9
  Top Layer w0.3: K5_U_rel_ladder1.4@102.326,31.368 102.321,31.363 102.321,29.293 102.315,29.288 110.814,29.288 110.814,29.538 110.359,29.994 K6_U_rel_ladder1.3@110.359,31.368
NetK5_U_rel_ladder1_6: K5_U_rel_ladder1.6 K6_U_rel_ladder1.7 R5_U_rel_ladder1.2 R7_U_rel_ladder1.1 | length 13
  Top Layer w0.3: K5_U_rel_ladder1.6@100.106,37.548 100.106,38.891 99.592,39.405 99.592,39.655 108.179,39.655 108.159,39.635 K6_U_rel_ladder1.7@108.159,37.568 K6_U_rel_ladder1.7@108.139,37.548
NetK5_U_rel_ladder1_8: K5_U_rel_ladder1.8 ULN3.13 | length 48.7
  Top Layer w0.2: ULN3.13@49.65,38.109 v1(50.525,38.109) ; v1(93.825,37.609) 94.719,37.609 K5_U_rel_ladder1.8@94.751,37.577
  Mid Layer 1 w0.2: v1(50.525,38.109) 51.364,38.109 51.725,37.748 51.725,35.909 52.33,35.304 92.125,35.304 93.825,37.004 v1(93.825,37.609)
NetK5_U_rel_ladder2_4: K5_U_rel_ladder2.4 K6_U_rel_ladder2.3 R6_U_rel_ladder2.2 R8_U_rel_ladder2.1 | length 12.9
  Top Layer w0.3: K5_U_rel_ladder2.4@102.326,44.068 102.321,44.063 102.321,41.993 102.315,41.988 110.814,41.988 110.814,42.238 110.359,42.694 K6_U_rel_ladder2.3@110.359,44.068
NetK5_U_rel_ladder2_6: K5_U_rel_ladder2.6 K6_U_rel_ladder2.7 R5_U_rel_ladder2.2 R7_U_rel_ladder2.1 | length 13
  Top Layer w0.3: K5_U_rel_ladder2.6@100.106,50.248 100.106,51.591 99.592,52.105 99.592,52.355 108.179,52.355 108.159,52.335 K6_U_rel_ladder2.7@108.159,50.268 K6_U_rel_ladder2.7@108.139,50.248
NetK5_U_rel_ladder2_8: K5_U_rel_ladder2.8 ULN4.13 | length 48.7
  Top Layer w0.2: ULN4.13@49.65,50.809 v1(50.525,50.809) ; v1(93.825,50.309) 94.719,50.309 K5_U_rel_ladder2.8@94.751,50.277
  Mid Layer 1 w0.2: v1(50.525,50.809) 51.364,50.809 51.725,50.448 51.725,48.609 52.33,48.004 92.125,48.004 93.825,49.704 v1(93.825,50.309)
NetK5_U_rel_ladder3_4: K5_U_rel_ladder3.4 K6_U_rel_ladder3.3 R6_U_rel_ladder3.2 R8_U_rel_ladder3.1 | length 12.9
  Top Layer w0.3: K5_U_rel_ladder3.4@102.326,56.768 102.321,56.763 102.321,54.693 102.315,54.688 110.814,54.688 110.814,54.938 110.359,55.394 K6_U_rel_ladder3.3@110.359,56.768
NetK5_U_rel_ladder3_6: K5_U_rel_ladder3.6 K6_U_rel_ladder3.7 R5_U_rel_ladder3.2 R7_U_rel_ladder3.1 | length 13
  Top Layer w0.3: K5_U_rel_ladder3.6@100.106,62.948 100.106,64.291 99.592,64.805 99.592,65.055 108.179,65.055 108.159,65.035 K6_U_rel_ladder3.7@108.159,62.968 K6_U_rel_ladder3.7@108.139,62.948
NetK5_U_rel_ladder3_8: K5_U_rel_ladder3.8 ULN5.13 | length 48.7
  Top Layer w0.2: ULN5.13@49.65,63.509 v1(50.525,63.509) ; v1(93.825,63.009) 94.719,63.009 K5_U_rel_ladder3.8@94.751,62.977
  Mid Layer 1 w0.2: v1(50.525,63.509) 51.364,63.509 51.725,63.148 51.725,61.309 52.33,60.704 92.125,60.704 93.825,62.404 v1(93.825,63.009)
NetK5_U_rel_ladder4_4: K5_U_rel_ladder4.4 K6_U_rel_ladder4.3 R6_U_rel_ladder4.2 R8_U_rel_ladder4.1 | length 12.9
  Top Layer w0.3: K5_U_rel_ladder4.4@102.326,69.468 102.321,69.463 102.321,67.393 102.315,67.388 110.814,67.388 110.814,67.638 110.359,68.094 K6_U_rel_ladder4.3@110.359,69.468
NetK5_U_rel_ladder4_6: K5_U_rel_ladder4.6 K6_U_rel_ladder4.7 R5_U_rel_ladder4.2 R7_U_rel_ladder4.1 | length 13
  Top Layer w0.3: K5_U_rel_ladder4.6@100.106,75.648 100.106,76.991 99.592,77.505 99.592,77.755 108.179,77.755 108.159,77.735 K6_U_rel_ladder4.7@108.159,75.668 K6_U_rel_ladder4.7@108.139,75.648
NetK5_U_rel_ladder4_8: K5_U_rel_ladder4.8 ULN6.13 | length 48.7
  Top Layer w0.2: ULN6.13@49.65,76.209 v1(50.525,76.209) ; v1(93.825,75.709) 94.719,75.709 K5_U_rel_ladder4.8@94.751,75.677
  Mid Layer 1 w0.2: v1(50.525,76.209) 51.364,76.209 51.725,75.848 51.725,74.009 52.33,73.404 92.125,73.404 93.825,75.104 v1(93.825,75.709)
NetK5_U_rel_ladder5_4: K5_U_rel_ladder5.4 K6_U_rel_ladder5.3 R6_U_rel_ladder5.2 R8_U_rel_ladder5.1 | length 12.9
  Top Layer w0.3: K5_U_rel_ladder5.4@102.326,82.168 102.321,82.163 102.321,80.093 102.315,80.088 110.814,80.088 110.814,80.338 110.359,80.794 K6_U_rel_ladder5.3@110.359,82.168
NetK5_U_rel_ladder5_6: K5_U_rel_ladder5.6 K6_U_rel_ladder5.7 R5_U_rel_ladder5.2 R7_U_rel_ladder5.1 | length 13
  Top Layer w0.3: K5_U_rel_ladder5.6@100.106,88.348 100.106,89.691 99.592,90.205 99.592,90.455 108.179,90.455 108.159,90.435 K6_U_rel_ladder5.7@108.159,88.368 K6_U_rel_ladder5.7@108.139,88.348
NetK5_U_rel_ladder5_8: K5_U_rel_ladder5.8 ULN7.13 | length 48.7
  Top Layer w0.2: ULN7.13@49.65,88.909 v1(50.525,88.909) ; v1(93.825,88.409) 94.719,88.409 K5_U_rel_ladder5.8@94.751,88.377
  Mid Layer 1 w0.2: v1(50.525,88.909) 51.364,88.909 51.725,88.548 51.725,86.709 52.33,86.104 92.125,86.104 93.825,87.804 v1(93.825,88.409)
NetK5_U_rel_ladder6_4: K5_U_rel_ladder6.4 K6_U_rel_ladder6.3 R6_U_rel_ladder6.2 R8_U_rel_ladder6.1 | length 12.9
  Bottom Layer w0.3: K5_U_rel_ladder6.4@102.339,88.4 102.347,88.409 102.347,90.498 R8_U_rel_ladder6.1@102.356,90.507 R6_U_rel_ladder6.2@110.856,90.507 110.856,90.257 110.384,89.785 K6_U_rel_ladder6.3@110.384,88.4
NetK5_U_rel_ladder6_6: K5_U_rel_ladder6.6 K6_U_rel_ladder6.7 R5_U_rel_ladder6.2 R7_U_rel_ladder6.1 | length 11.5
  Bottom Layer w0.3: R7_U_rel_ladder6.1@99.656,80.166 R7_U_rel_ladder6.1@99.656,80.416 ; K5_U_rel_ladder6.6@100.139,81.521 100.139,80.899 R7_U_rel_ladder6.1@99.656,80.416 ; K6_U_rel_ladder6.7@108.184,81.521 108.17,81.507 108.17,80.18 R5_U_rel_ladder6.2@108.156,80.166 99.906,80.166 R7_U_rel_ladder6.1@99.656,80.416
NetK5_U_rel_ladder6_8: K5_U_rel_ladder6.8 ULN8.13 | length 51.5
  Mid Layer 2 w0.2: v1(50.504,81.632) 51.899,81.632 52.299,82.032 52.299,85.007 53.429,86.137 92.099,86.137 93.804,84.432 v1(93.804,82.632)
  Bottom Layer w0.2: ULN8.13@49.629,81.632 v1(50.504,81.632) ; v1(93.804,82.632) 94.489,82.632 94.739,82.382 K5_U_rel_ladder6.8@94.739,82.2
NetK5_U_rel_ladder7_4: K5_U_rel_ladder7.4 K6_U_rel_ladder7.3 R6_U_rel_ladder7.2 R8_U_rel_ladder7.1 | length 12.9
  Bottom Layer w0.3: K5_U_rel_ladder7.4@102.335,75.668 102.343,75.677 102.343,77.766 R8_U_rel_ladder7.1@102.352,77.775 R6_U_rel_ladder7.2@110.852,77.775 110.852,77.525 110.38,77.053 K6_U_rel_ladder7.3@110.38,75.668
NetK5_U_rel_ladder7_6: K5_U_rel_ladder7.6 K6_U_rel_ladder7.7 R5_U_rel_ladder7.2 R7_U_rel_ladder7.1 | length 11.5
  Bottom Layer w0.3: R7_U_rel_ladder7.1@99.652,67.434 R7_U_rel_ladder7.1@99.652,67.684 ; K5_U_rel_ladder7.6@100.135,68.789 100.135,68.167 R7_U_rel_ladder7.1@99.652,67.684 ; K6_U_rel_ladder7.7@108.18,68.789 108.166,68.775 108.166,67.448 R5_U_rel_ladder7.2@108.152,67.434 99.902,67.434 R7_U_rel_ladder7.1@99.652,67.684
NetK5_U_rel_ladder7_8: K5_U_rel_ladder7.8 ULN9.13 | length 51.5
  Mid Layer 2 w0.2: v1(50.5,68.9) 51.895,68.9 52.295,69.3 52.295,72.275 53.425,73.405 92.095,73.405 93.8,71.7 v1(93.8,69.9)
  Bottom Layer w0.2: ULN9.13@49.625,68.9 v1(50.5,68.9) ; v1(93.8,69.9) 94.485,69.9 94.735,69.65 K5_U_rel_ladder7.8@94.735,69.468
NetK5_U_rel_ladder8_4: K5_U_rel_ladder8.4 K6_U_rel_ladder8.3 R6_U_rel_ladder8.2 R8_U_rel_ladder8.1 | length 12.9
  Bottom Layer w0.3: K5_U_rel_ladder8.4@102.335,62.968 102.343,62.977 102.343,65.066 R8_U_rel_ladder8.1@102.352,65.075 R6_U_rel_ladder8.2@110.852,65.075 110.852,64.825 110.38,64.353 K6_U_rel_ladder8.3@110.38,62.968
NetK5_U_rel_ladder8_6: K5_U_rel_ladder8.6 K6_U_rel_ladder8.7 R5_U_rel_ladder8.2 R7_U_rel_ladder8.1 | length 11.5
  Bottom Layer w0.3: R7_U_rel_ladder8.1@99.652,54.734 R7_U_rel_ladder8.1@99.652,54.984 ; K5_U_rel_ladder8.6@100.135,56.089 100.135,55.467 R7_U_rel_ladder8.1@99.652,54.984 ; K6_U_rel_ladder8.7@108.18,56.089 108.166,56.075 108.166,54.748 R5_U_rel_ladder8.2@108.152,54.734 99.902,54.734 R7_U_rel_ladder8.1@99.652,54.984
NetK5_U_rel_ladder8_8: K5_U_rel_ladder8.8 ULN10.13 | length 51.5
  Mid Layer 2 w0.2: v1(50.5,56.2) 51.895,56.2 52.295,56.6 52.295,59.575 53.425,60.705 92.095,60.705 93.8,59 v1(93.8,57.2)
  Bottom Layer w0.2: ULN10.13@49.625,56.2 v1(50.5,56.2) ; v1(93.8,57.2) 94.485,57.2 94.735,56.95 K5_U_rel_ladder8.8@94.735,56.768
NetK5_U_rel_ladder9_4: K5_U_rel_ladder9.4 K6_U_rel_ladder9.3 R6_U_rel_ladder9.2 R8_U_rel_ladder9.1 | length 12.9
  Bottom Layer w0.3: K5_U_rel_ladder9.4@102.321,50.268 102.329,50.277 102.329,52.366 R8_U_rel_ladder9.1@102.338,52.375 R6_U_rel_ladder9.2@110.838,52.375 110.838,52.125 110.366,51.653 K6_U_rel_ladder9.3@110.366,50.268
NetK5_U_rel_ladder9_6: K5_U_rel_ladder9.6 K6_U_rel_ladder9.7 R5_U_rel_ladder9.2 R7_U_rel_ladder9.1 | length 11.5
  Bottom Layer w0.3: R7_U_rel_ladder9.1@99.638,42.034 R7_U_rel_ladder9.1@99.638,42.284 ; K5_U_rel_ladder9.6@100.121,43.389 100.121,42.767 R7_U_rel_ladder9.1@99.638,42.284 ; K6_U_rel_ladder9.7@108.166,43.389 108.152,43.375 108.152,42.048 R5_U_rel_ladder9.2@108.138,42.034 99.888,42.034 R7_U_rel_ladder9.1@99.638,42.284
NetK5_U_rel_ladder9_8: K5_U_rel_ladder9.8 ULN11.13 | length 51.5
  Mid Layer 2 w0.2: v1(50.486,43.5) 51.881,43.5 52.281,43.9 52.281,46.875 53.411,48.005 92.081,48.005 93.786,46.3 v1(93.786,44.5)
  Bottom Layer w0.2: ULN11.13@49.611,43.5 v1(50.486,43.5) ; v1(93.786,44.5) 94.471,44.5 94.721,44.25 K5_U_rel_ladder9.8@94.721,44.068
NetK5_U_rel_ladder10_4: K5_U_rel_ladder10.4 K6_U_rel_ladder10.3 R6_U_rel_ladder10.2 R8_U_rel_ladder10.1 | length 12.9
  Bottom Layer w0.3: K5_U_rel_ladder10.4@102.335,37.568 102.343,37.577 102.343,39.666 R8_U_rel_ladder10.1@102.352,39.675 R6_U_rel_ladder10.2@110.852,39.675 110.852,39.425 110.38,38.953 K6_U_rel_ladder10.3@110.38,37.568
NetK5_U_rel_ladder10_6: K5_U_rel_ladder10.6 K6_U_rel_ladder10.7 R5_U_rel_ladder10.2 R7_U_rel_ladder10.1 | length 11.5
  Bottom Layer w0.3: R7_U_rel_ladder10.1@99.652,29.334 R7_U_rel_ladder10.1@99.652,29.584 ; K5_U_rel_ladder10.6@100.135,30.689 100.135,30.067 R7_U_rel_ladder10.1@99.652,29.584 ; K6_U_rel_ladder10.7@108.18,30.689 108.166,30.675 108.166,29.348 R5_U_rel_ladder10.2@108.152,29.334 99.902,29.334 R7_U_rel_ladder10.1@99.652,29.584
NetK5_U_rel_ladder10_8: K5_U_rel_ladder10.8 ULN12.13 | length 51.5
  Mid Layer 2 w0.2: v1(50.5,30.8) 51.895,30.8 52.295,31.2 52.295,34.175 53.425,35.305 92.095,35.305 93.8,33.6 v1(93.8,31.8)
  Bottom Layer w0.2: ULN12.13@49.625,30.8 v1(50.5,30.8) ; v1(93.8,31.8) 94.485,31.8 94.735,31.55 K5_U_rel_ladder10.8@94.735,31.368
NetK6_U_rel_ladder1_4: K6_U_rel_ladder1.4 K7_U_rel_ladder1.3 R4_U_rel_ladder1.2 R6_U_rel_ladder1.1 | length 12.9
  Top Layer w0.3: K6_U_rel_ladder1.4@112.559,31.368 112.553,31.363 112.553,29.293 R6_U_rel_ladder1.1@112.548,29.288 R4_U_rel_ladder1.2@121.047,29.288 121.047,29.538 120.591,29.994 K7_U_rel_ladder1.3@120.591,31.368
NetK6_U_rel_ladder1_6: K6_U_rel_ladder1.6 K7_U_rel_ladder1.7 R3_U_rel_ladder1.2 R5_U_rel_ladder1.1 | length 13
  Top Layer w0.3: K6_U_rel_ladder1.6@110.339,37.548 110.339,38.891 109.825,39.405 109.825,39.655 118.412,39.655 118.391,39.635 K7_U_rel_ladder1.7@118.391,37.568 K7_U_rel_ladder1.7@118.371,37.548
NetK6_U_rel_ladder1_8: K6_U_rel_ladder1.8 ULN3.12 | length 58.9
  Top Layer w0.2: ULN3.12@49.65,37.609 v1(50.925,37.609) ; v1(104.025,37.609) 104.952,37.609 K6_U_rel_ladder1.8@104.984,37.577
  Mid Layer 1 w0.2: v1(50.925,37.609) 50.973,37.561 51.196,37.561 51.325,37.432 51.325,35.809 52.131,35.003 102.119,35.003 104.025,36.909 v1(104.025,37.609)
NetK6_U_rel_ladder2_4: K6_U_rel_ladder2.4 K7_U_rel_ladder2.3 R4_U_rel_ladder2.2 R6_U_rel_ladder2.1 | length 12.9
  Top Layer w0.3: K6_U_rel_ladder2.4@112.559,44.068 112.553,44.063 112.553,41.993 R6_U_rel_ladder2.1@112.548,41.988 R4_U_rel_ladder2.2@121.047,41.988 121.047,42.238 120.591,42.694 K7_U_rel_ladder2.3@120.591,44.068
NetK6_U_rel_ladder2_6: K6_U_rel_ladder2.6 K7_U_rel_ladder2.7 R3_U_rel_ladder2.2 R5_U_rel_ladder2.1 | length 13
  Top Layer w0.3: K6_U_rel_ladder2.6@110.339,50.248 110.339,51.591 109.825,52.105 109.825,52.355 118.412,52.355 118.391,52.335 K7_U_rel_ladder2.7@118.391,50.268 K7_U_rel_ladder2.7@118.371,50.248
NetK6_U_rel_ladder2_8: K6_U_rel_ladder2.8 ULN4.12 | length 58.9
  Top Layer w0.2: ULN4.12@49.65,50.309 v1(50.925,50.309) ; v1(104.025,50.309) 104.952,50.309 K6_U_rel_ladder2.8@104.984,50.277
  Mid Layer 1 w0.2: v1(50.925,50.309) 50.973,50.261 51.196,50.261 51.325,50.132 51.325,48.509 52.131,47.703 102.119,47.703 104.025,49.609 v1(104.025,50.309)
NetK6_U_rel_ladder3_4: K6_U_rel_ladder3.4 K7_U_rel_ladder3.3 R4_U_rel_ladder3.2 R6_U_rel_ladder3.1 | length 12.9
  Top Layer w0.3: K6_U_rel_ladder3.4@112.559,56.768 112.553,56.763 112.553,54.693 R6_U_rel_ladder3.1@112.548,54.688 R4_U_rel_ladder3.2@121.047,54.688 121.047,54.938 120.591,55.394 K7_U_rel_ladder3.3@120.591,56.768
NetK6_U_rel_ladder3_6: K6_U_rel_ladder3.6 K7_U_rel_ladder3.7 R3_U_rel_ladder3.2 R5_U_rel_ladder3.1 | length 13
  Top Layer w0.3: K6_U_rel_ladder3.6@110.339,62.948 110.339,64.291 109.825,64.805 109.825,65.055 118.412,65.055 118.391,65.035 K7_U_rel_ladder3.7@118.391,62.968 K7_U_rel_ladder3.7@118.371,62.948
NetK6_U_rel_ladder3_8: K6_U_rel_ladder3.8 ULN5.12 | length 58.9
  Top Layer w0.2: ULN5.12@49.65,63.009 v1(50.925,63.009) ; v1(104.025,63.009) 104.952,63.009 K6_U_rel_ladder3.8@104.984,62.977
  Mid Layer 1 w0.2: v1(50.925,63.009) 50.973,62.961 51.196,62.961 51.325,62.832 51.325,61.209 52.131,60.403 102.119,60.403 104.025,62.309 v1(104.025,63.009)
NetK6_U_rel_ladder4_4: K6_U_rel_ladder4.4 K7_U_rel_ladder4.3 R4_U_rel_ladder4.2 R6_U_rel_ladder4.1 | length 12.9
  Top Layer w0.3: K6_U_rel_ladder4.4@112.559,69.468 112.553,69.463 112.553,67.393 R6_U_rel_ladder4.1@112.548,67.388 R4_U_rel_ladder4.2@121.047,67.388 121.047,67.638 120.591,68.094 K7_U_rel_ladder4.3@120.591,69.468
NetK6_U_rel_ladder4_6: K6_U_rel_ladder4.6 K7_U_rel_ladder4.7 R3_U_rel_ladder4.2 R5_U_rel_ladder4.1 | length 13
  Top Layer w0.3: K6_U_rel_ladder4.6@110.339,75.648 110.339,76.991 109.825,77.505 109.825,77.755 118.412,77.755 118.391,77.735 K7_U_rel_ladder4.7@118.391,75.668 K7_U_rel_ladder4.7@118.371,75.648
NetK6_U_rel_ladder4_8: K6_U_rel_ladder4.8 ULN6.12 | length 58.9
  Top Layer w0.2: ULN6.12@49.65,75.709 v1(50.925,75.709) ; v1(104.025,75.709) 104.952,75.709 K6_U_rel_ladder4.8@104.984,75.677
  Mid Layer 1 w0.2: v1(50.925,75.709) 50.973,75.661 51.196,75.661 51.325,75.532 51.325,73.909 52.131,73.103 102.119,73.103 104.025,75.009 v1(104.025,75.709)
NetK6_U_rel_ladder5_4: K6_U_rel_ladder5.4 K7_U_rel_ladder5.3 R4_U_rel_ladder5.2 R6_U_rel_ladder5.1 | length 12.9
  Top Layer w0.3: K6_U_rel_ladder5.4@112.559,82.168 112.553,82.163 112.553,80.093 R6_U_rel_ladder5.1@112.548,80.088 R4_U_rel_ladder5.2@121.047,80.088 121.047,80.338 120.591,80.794 K7_U_rel_ladder5.3@120.591,82.168
NetK6_U_rel_ladder5_6: K6_U_rel_ladder5.6 K7_U_rel_ladder5.7 R3_U_rel_ladder5.2 R5_U_rel_ladder5.1 | length 13
  Top Layer w0.3: K6_U_rel_ladder5.6@110.339,88.348 110.339,89.691 109.825,90.205 109.825,90.455 118.412,90.455 118.391,90.435 K7_U_rel_ladder5.7@118.391,88.368 K7_U_rel_ladder5.7@118.371,88.348
NetK6_U_rel_ladder5_8: K6_U_rel_ladder5.8 ULN7.12 | length 58.9
  Top Layer w0.2: ULN7.12@49.65,88.409 v1(50.925,88.409) ; v1(104.025,88.409) 104.952,88.409 K6_U_rel_ladder5.8@104.984,88.377
  Mid Layer 1 w0.2: v1(50.925,88.409) 50.973,88.361 51.196,88.361 51.325,88.232 51.325,86.609 52.131,85.803 102.119,85.803 104.025,87.709 v1(104.025,88.409)